# Altium PCB AMS_Slave_no_viable.PcbDoc
Units mm, origin at the board's own origin, x right, y up, seen from the top; angles counter-clockwise.
Board outline 84.45 x 58.17 mm, 2 copper layers (Top Layer, Bottom Layer); 196 components, 139 nets, 544 pads, 2 vias.
Unrouted connection lines stored in the file: 391.
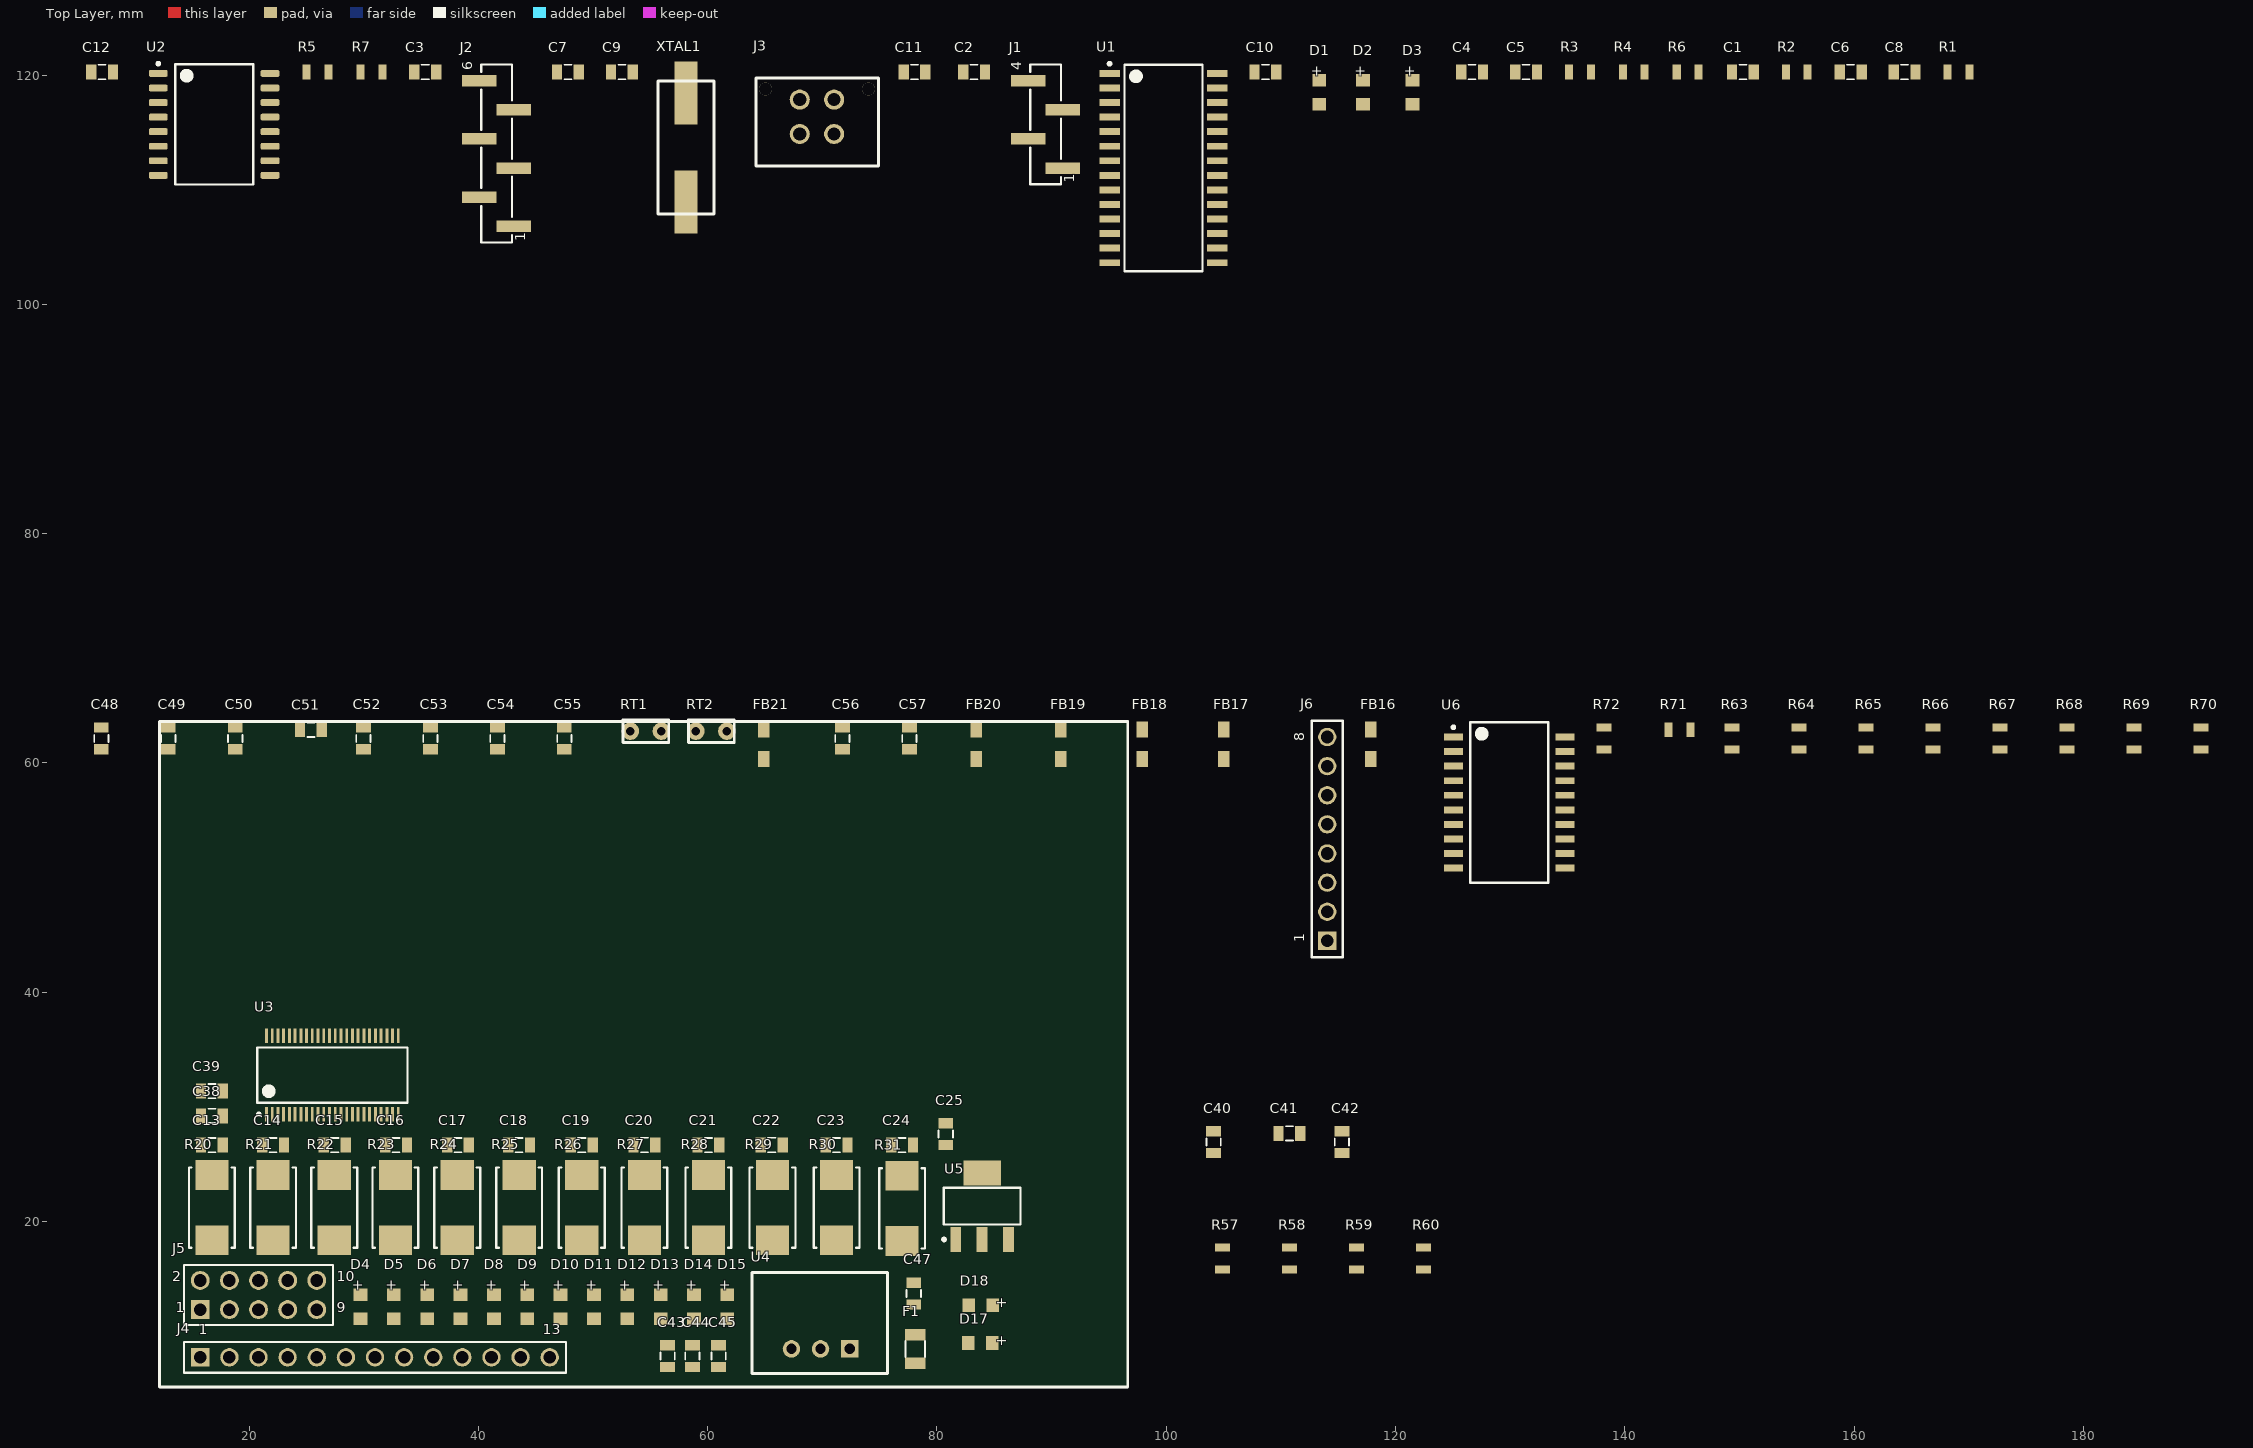
[diagram p0: Top Layer view]
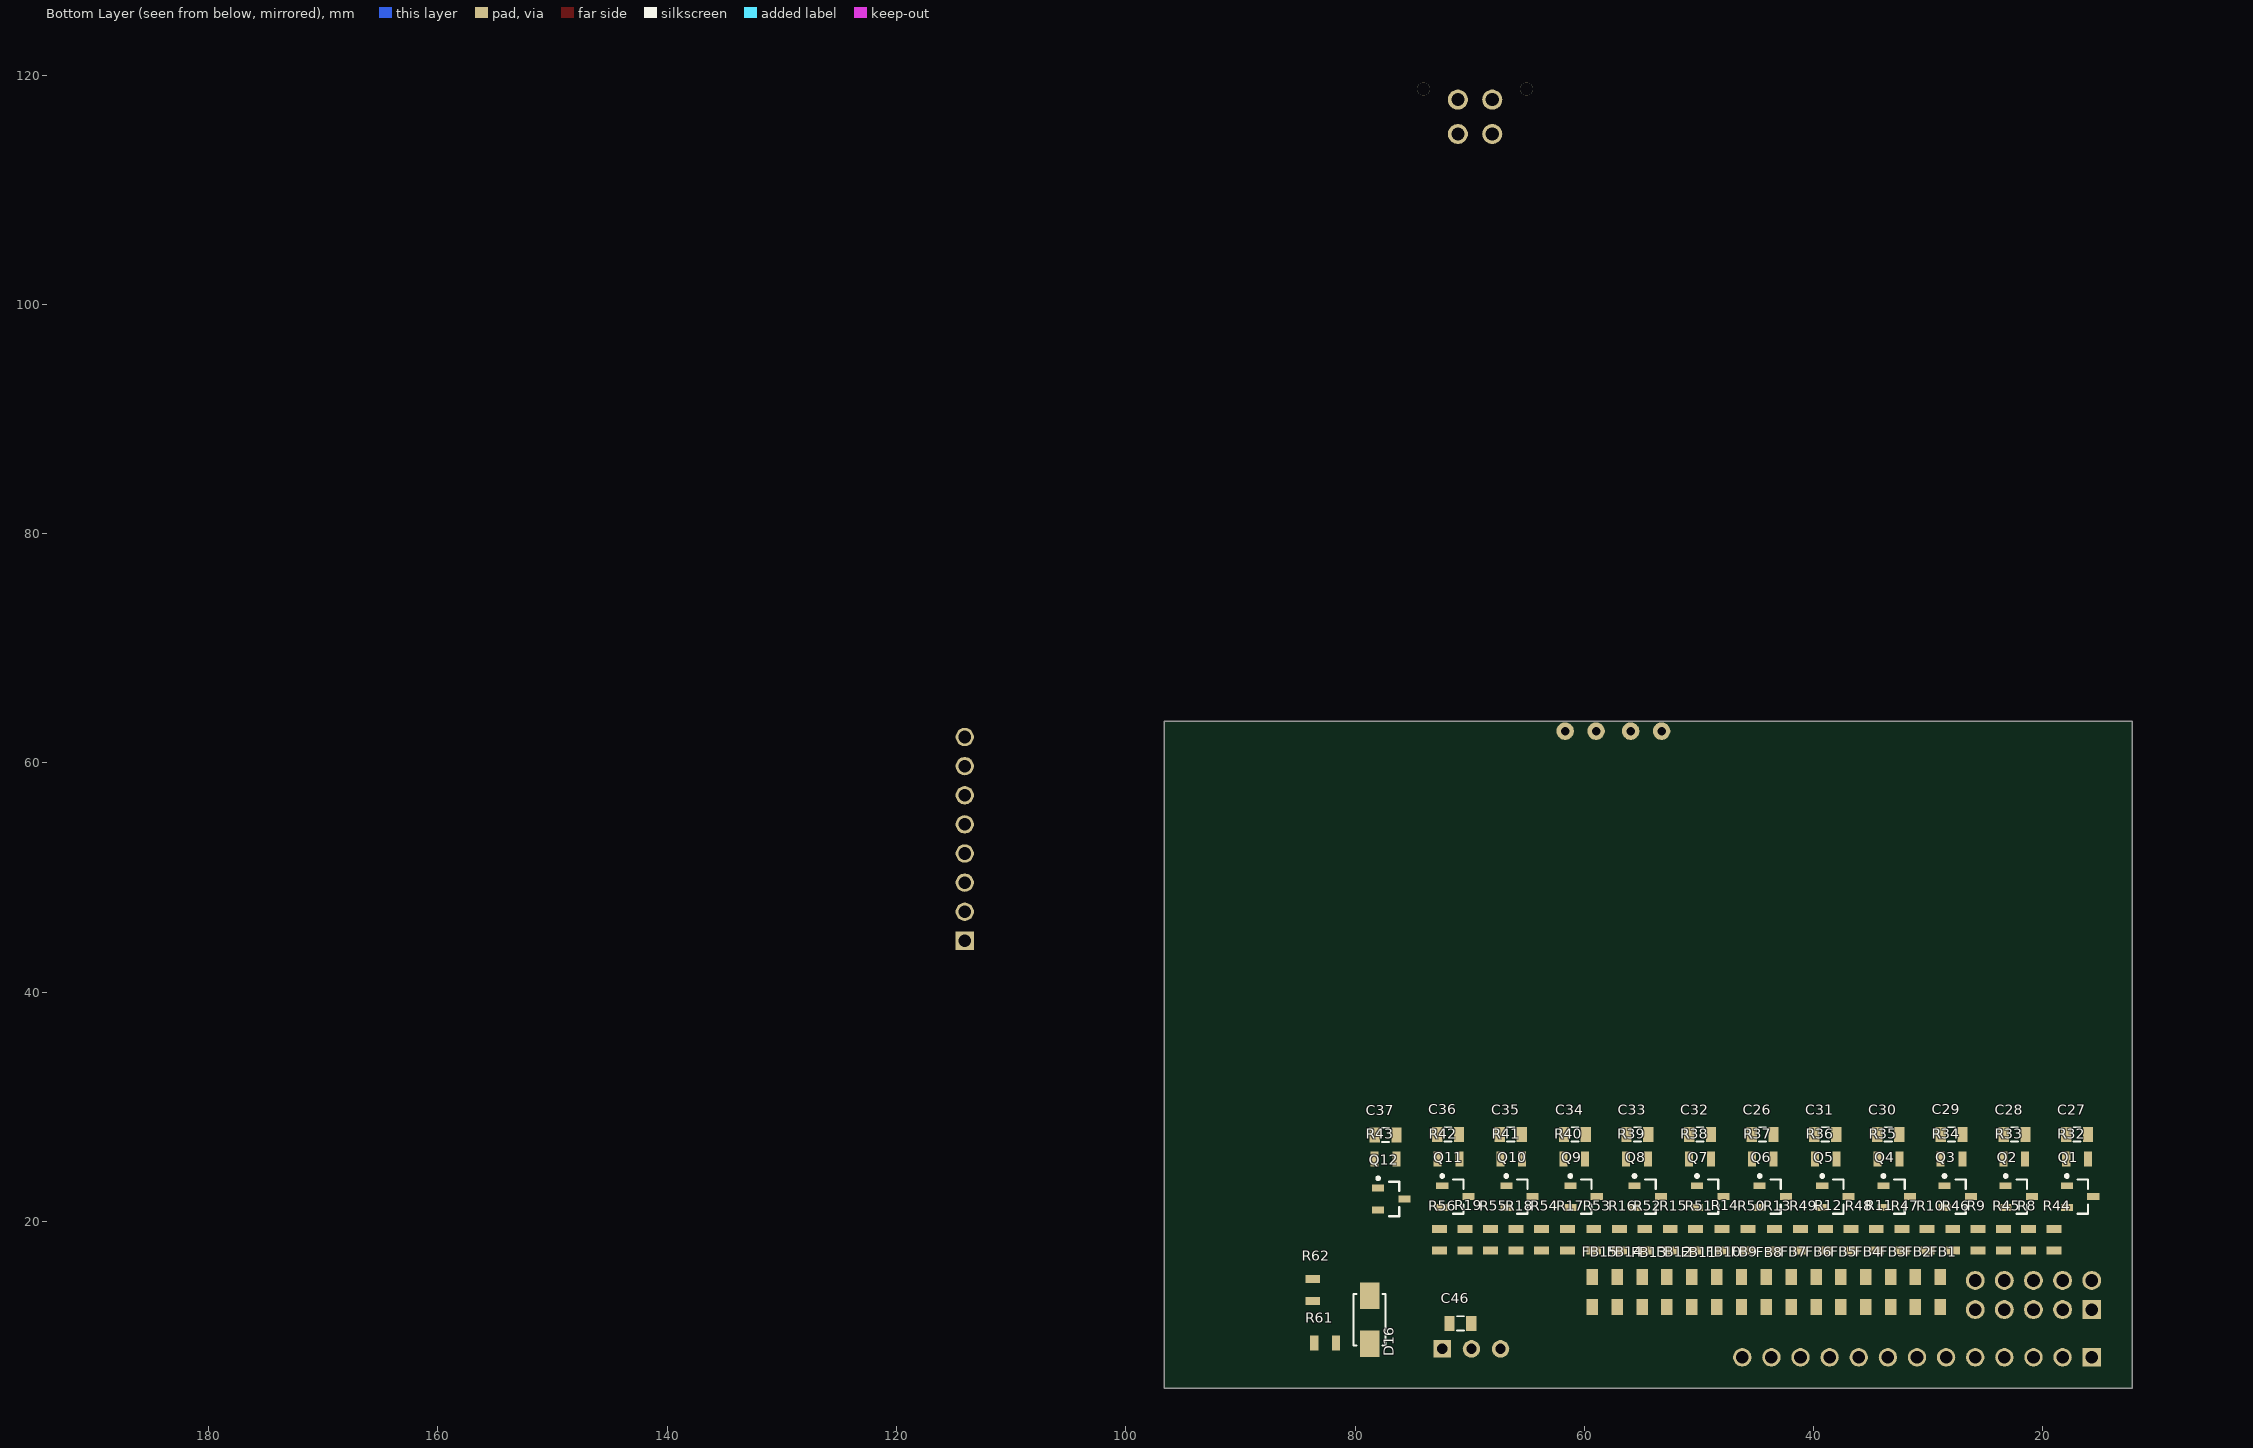
[diagram p1: Bottom Layer view, seen from below]

## Layer stack, top to bottom
Top Solder: solder mask 0.0102, Solder Resist, Dk 3.5
Top Layer: signal copper 0.0356
Dielectric 1: dielectric 0.32, FR-4, Dk 4.8
Bottom Layer: signal copper 0.0356
Bottom Solder: solder mask 0.0102, Solder Resist, Dk 3.5

## Board outline
12.192,5.461 96.647,5.461 96.647,63.627 12.192,63.627

## Design rules (kind name [scope] priority, off if disabled: settings)
Clearance [All] p1: gap=0.254 ignorepadtopadclearanceinfootprint=FALSE except(0: Arc-Hole Track-Hole SMDPad-Hole THPad-Hole Via-Hole Fill-Hole Poly-Hole Region-Hole Text-Hole)
PolygonConnect [All] p1: connectstyle=Relief reliefconductorwidth=0.254 reliefentries=4 polygonreliefangle="90 Angle" airgapwidth=0.254
RoomDefinition AMS_temperature [InComponentClass('AMS_temperature')] p1: confinementstyle=ConfineIn formatcopy=TRUE lockcomponents=FALSE outline 12.192,42.702 200.279,42.702 200.279,66.578 12.192,66.578
RoomDefinition AMS_supply [InComponentClass('AMS_supply')] p2: confinementstyle=ConfineIn formatcopy=TRUE lockcomponents=FALSE outline 53.848,5.588 91.821,5.588 91.821,25.781 53.848,25.781
RoomDefinition AMS_MCU [InComponentClass('AMS_MCU')] p3: confinementstyle=ConfineIn formatcopy=TRUE lockcomponents=FALSE outline 12.192,102.362 177.927,102.362 177.927,123.952 12.192,123.952
RoomDefinition AMS_balancing [InComponentClass('AMS_balancing')] p4: confinementstyle=ConfineIn formatcopy=TRUE lockcomponents=FALSE outline 12.192,5.461 129.159,5.461 129.159,42.037 12.192,42.037
RoutingVias [All] p1: holewidth=0.711 width=1.27 viastyle="Through Hole" minholewidth=0.711 minwidth=1.27 maxholewidth=0.711 maxwidth=1.27
SolderMaskExpansion [All] p1: expansion=0.102
Width [All] p1: maxlimit=0.254 minlimit=0.254 preferedwidth=0.254
30 further rules are at their usual default settings.

## Classes and differential pairs
component class AMS_temperature: C48 C49 C50 C51 C52 C53 C54 C55 C56 C57 FB16 FB17 FB18 FB19 FB20 FB21 J6 R63 R64 R65 R66 R67 R68 R69 R70 R71 R72 RT1 RT2 U6
component class AMS_supply: C43 C44 C45 C46 C47 D16 D17 D18 F1 R61 R62 U4 U5
component class AMS_MCU: C1 C2 C3 C4 C5 C6 C7 C8 C9 C10 C11 C12 D1 D2 D3 J1 J2 J3 R1 R2 R3 R4 R5 R6 R7 U1 U2 XTAL1
component class AMS_balancing: C13 C14 C15 C16 C17 C18 C19 C20 C21 C22 C23 C24 C25 C26 C27 C28 C29 C30 C31 C32 C33 C34 C35 C36 C37 C38 C39 C40 C41 C42 D4 D5 D6 D7 D8 D9 D10 D11 D12 D13 D14 D15 FB1 FB2 FB3 FB4 FB5 FB6 FB7 FB8 FB9 FB10 FB11 FB12 FB13 FB14 FB15 J4 J5 Q1 Q2 Q3 Q4 Q5 Q6 Q7 Q8 Q9 Q10 Q11 Q12 R8 R9 R10 R11 R12 R13 R14 R15 R16 R17 R18 R19 R20 R21 R22 R23 R24 R25 R26 R27 R28 R29 R30 R31 R32 R33 R34 R35 R36 R37 R38 R39 R40 R41 R42 R43 R44 R45 R46 R47 R48 R49 R50 R51 R52 R53 R54 R55 R56 R57 R58 R59 R60 U3

## Components (designator, comment, footprint, x,y, rotation, side; value= is the part's Value field where it differs from the comment)
C1 "10nF" "0805_2x1.25x0.8mm_Reflow Soldering" 150.307,120.269 r0 top
C2 "15pF" "0805_2x1.25x0.6mm_Reflow Soldering" 83.251,120.269 r0 top
C3 "15pF" "0805_2x1.25x0.6mm_Reflow Soldering" 35.372,120.269 r0 top
C4 "1nF" "0805_2x1.25x0.8mm_Reflow Soldering" 126.685,120.269 r0 top
C5 "100nF" "0805_2x1.25x0.8mm_Reflow Soldering" 131.384,120.269 r0 top
C6 "1nF" "0805_2x1.25x0.8mm_Reflow Soldering" 159.705,120.269 r0 top
C7 "10uF" "0805_2x1.25x1.25mm_Reflow Soldering" 47.818,120.269 r0 top
C8 "100nF" "0805_2x1.25x0.8mm_Reflow Soldering" 164.404,120.269 r0 top
C9 "100nF" "0805_2x1.25x0.8mm_Reflow Soldering" 52.517,120.269 r0 top
C10 "10uF" "0805_2x1.25x1.25mm_Reflow Soldering" 108.651,120.269 r0 top
C11 "100nF" "0805_2x1.25x0.8mm_Reflow Soldering" 78.044,120.269 r0 top
C12 "10nF" "0805_2x1.25x0.8mm_Reflow Soldering" 7.178,120.269 r0 top
C13 "50V, 10nF" "0805_2x1.25x0.8mm_Reflow Soldering" 16.764,26.663 r180 top value=10nF
C14 "50V, 10nF" "0805_2x1.25x0.8mm_Reflow Soldering" 22.098,26.663 r180 top value=10nF
C15 "50V, 10nF" "0805_2x1.25x0.8mm_Reflow Soldering" 27.475,26.663 r180 top value=10nF
C16 "50V, 10nF" "0805_2x1.25x0.8mm_Reflow Soldering" 32.827,26.663 r180 top value=10nF
C17 "50V, 10nF" "0805_2x1.25x0.8mm_Reflow Soldering" 38.227,26.663 r180 top value=10nF
C18 "50V, 10nF" "0805_2x1.25x0.8mm_Reflow Soldering" 43.561,26.663 r180 top value=10nF
C19 "50V, 10nF" "0805_2x1.25x0.8mm_Reflow Soldering" 49.022,26.663 r180 top value=10nF
C20 "50V, 10nF" "0805_2x1.25x0.8mm_Reflow Soldering" 54.483,26.67 r180 top value=10nF
C21 "50V, 10nF" "0805_2x1.25x0.8mm_Reflow Soldering" 60.071,26.663 r180 top value=10nF
C22 "50V, 10nF" "0805_2x1.25x0.8mm_Reflow Soldering" 65.593,26.67 r180 top value=10nF
C23 "50V, 10nF" "0805_2x1.25x0.8mm_Reflow Soldering" 71.247,26.663 r180 top value=10nF
C24 "50V, 10nF" "0805_2x1.25x0.8mm_Reflow Soldering" 76.962,26.663 r180 top value=10nF
C25 "50V, 10nF" "0805_2x1.25x0.8mm_Reflow Soldering" 80.772,27.62 r90 top value=10nF
C26 "50V, 10nF" "0805_2x1.25x0.8mm_Reflow Soldering" 44.45,27.603 r180 bottom value=10nF
C27 "50V, 10nF" "0805_2x1.25x0.8mm_Reflow Soldering" 17.018,27.603 r180 bottom value=10nF
C28 "50V, 10nF" "0805_2x1.25x0.8mm_Reflow Soldering" 22.479,27.603 r180 bottom value=10nF
C29 "50V, 10nF" "0805_2x1.25x0.8mm_Reflow Soldering" 27.975,27.603 r180 bottom value=10nF
C30 "50V, 10nF" "0805_2x1.25x0.8mm_Reflow Soldering" 33.497,27.603 r180 bottom value=10nF
C31 "50V, 10nF" "0805_2x1.25x0.8mm_Reflow Soldering" 38.989,27.603 r180 bottom value=10nF
C32 "50V, 10nF" "0805_2x1.25x0.8mm_Reflow Soldering" 49.911,27.603 r180 bottom value=10nF
C33 "50V, 10nF" "0805_2x1.25x0.8mm_Reflow Soldering" 55.372,27.603 r180 bottom value=10nF
C34 "50V, 10nF" "0805_2x1.25x0.8mm_Reflow Soldering" 60.833,27.603 r180 bottom value=10nF
C35 "50V, 10nF" "0805_2x1.25x0.8mm_Reflow Soldering" 66.421,27.603 r180 bottom value=10nF
C36 "50V, 10nF" "0805_2x1.25x0.8mm_Reflow Soldering" 71.882,27.603 r180 bottom value=10nF
C37 "50V, 10nF" "0805_2x1.25x0.8mm_Reflow Soldering" 77.343,27.559 r180 bottom value=10nF
C38 "50V, 10nF" "0805_2x1.25x0.8mm_Reflow Soldering" 16.764,29.21 r180 top value=10nF
C39 "50V, 100nF" "0805_2x1.25x0.8mm_Reflow Soldering" 16.764,31.369 r180 top value=100nF
C40 "50V, 1uF" "0805_2x1.25x1.25mm_Reflow Soldering" 104.14,26.924 r90 top value=1uF
C41 "50V, 1uF" "0805_2x1.25x1.25mm_Reflow Soldering" 110.744,27.686 r0 top value=1uF
C42 "50V, 1uF" "0805_2x1.25x1.25mm_Reflow Soldering" 115.316,26.924 r90 top value=1uF
C43 "1uF" "0805_2x1.25x1.25mm_Reflow Soldering" 56.515,8.255 r270 top
C44 "1uF" "0805_2x1.25x1.25mm_Reflow Soldering" 58.674,8.255 r270 top
C45 "1uF" "0805_2x1.25x1.25mm_Reflow Soldering" 60.96,8.255 r270 top
C46 "100nF" "0805_2x1.25x0.8mm_Reflow Soldering" 70.809,11.117 r0 bottom
C47 "10nF" "0805_2x1.25x0.8mm_Reflow Soldering" 77.978,13.716 r90 top
C48 "10nF" "0805_2x1.25x0.8mm_Reflow Soldering" 7.112,62.133 r90 top
C49 "10nF" "0805_2x1.25x0.8mm_Reflow Soldering" 12.954,62.133 r90 top
C50 "10nF" "0805_2x1.25x0.8mm_Reflow Soldering" 18.796,62.133 r90 top
C51 "10nF" "0805_2x1.25x0.8mm_Reflow Soldering" 25.4,62.895 r0 top
C52 "10nF" "0805_2x1.25x0.8mm_Reflow Soldering" 29.972,62.133 r90 top
C53 "10nF" "0805_2x1.25x0.8mm_Reflow Soldering" 35.814,62.133 r90 top
C54 "10nF" "0805_2x1.25x0.8mm_Reflow Soldering" 41.656,62.133 r90 top
C55 "10nF" "0805_2x1.25x0.8mm_Reflow Soldering" 47.498,62.133 r90 top
C56 "10nF" "0805_2x1.25x0.8mm_Reflow Soldering" 71.755,62.133 r90 top
C57 "100nF" "0805_2x1.25x0.8mm_Reflow Soldering" 77.597,62.133 r90 top
D1 "Blue" WL-SMCW_0805 113.35,118.491 r90 top
D2 "Blue" WL-SMCW_0805 117.16,118.491 r90 top
D3 "Red" WL-SMCW_0805 121.478,118.491 r90 top
D4 "Yellow" WL-SMCW_0805 29.718,12.574 r90 top
D5 "Yellow" WL-SMCW_0805 32.627,12.574 r90 top
D6 "Yellow" WL-SMCW_0805 35.537,12.574 r90 top
D7 "Yellow" WL-SMCW_0805 38.446,12.574 r90 top
D8 "Yellow" WL-SMCW_0805 41.356,12.574 r90 top
D9 "Yellow" WL-SMCW_0805 44.265,12.574 r90 top
D10 "Yellow" WL-SMCW_0805 47.175,12.574 r90 top
D11 "Yellow" WL-SMCW_0805 50.084,12.574 r90 top
D12 "Yellow" WL-SMCW_0805 52.994,12.574 r90 top
D13 "Yellow" WL-SMCW_0805 55.903,12.574 r90 top
D14 "Yellow" WL-SMCW_0805 58.813,12.574 r90 top
D15 "Yellow" WL-SMCW_0805 61.722,12.574 r90 top
D16 "400W, 5V" WE-TVSP_DO-214AC_Bidirectional 78.74,11.43 r270 bottom
D17 "Green" WL-SMCW_0805 83.786,9.398 r0 top
D18 "Bright Green" WL-SMCW_0805 83.82,12.7 r0 top
F1 "63 V, 0.5A" "437 Series" 78.105,8.89 r90 top
FB1 "560 Ohm" "0805_High Current" 28.956,13.843 r90 bottom
FB2 "560 Ohm" "0805_High Current" 31.123,13.843 r90 bottom
FB3 "560 Ohm" "0805_High Current" 33.291,13.843 r90 bottom
FB4 "560 Ohm" "0805_High Current" 35.458,13.843 r90 bottom
FB5 "560 Ohm" "0805_High Current" 37.626,13.843 r90 bottom
FB6 "560 Ohm" "0805_High Current" 39.793,13.843 r90 bottom
FB7 "560 Ohm" "0805_High Current" 41.96,13.843 r90 bottom
FB8 "560 Ohm" "0805_High Current" 44.128,13.843 r90 bottom
FB9 "560 Ohm" "0805_High Current" 46.295,13.843 r90 bottom
FB10 "560 Ohm" "0805_High Current" 48.463,13.843 r90 bottom
FB11 "560 Ohm" "0805_High Current" 50.63,13.843 r90 bottom
FB12 "560 Ohm" "0805_High Current" 52.797,13.843 r90 bottom
FB13 "560 Ohm" "0805_High Current" 54.965,13.843 r90 bottom
FB14 "560 Ohm" "0805_High Current" 57.132,13.843 r90 bottom
FB15 "560 Ohm" "0805_High Current" 59.299,13.843 r90 bottom
FB16 "560 Ohm" "0805_High Current" 117.856,61.625 r90 top
FB17 "560 Ohm" "0805_High Current" 105.029,61.625 r90 top
FB18 "560 Ohm" "0805_High Current" 97.917,61.625 r90 top
FB19 "560 Ohm" "0805_High Current" 90.805,61.625 r90 top
FB20 "560 Ohm" "0805_High Current" 83.439,61.625 r90 top
FB21 "560 Ohm" "0805_High Current" 64.897,61.625 r90 top
J1 "61000418221" 61000418221 89.474,115.697 r90 top
J2 "61000618221" 61000618221 41.595,113.157 r90 top
J3 "43045-0427" 43045-0427 69.535,117.856 r0 top
J4 "61301311121" 61301311121-bottom 30.988,8.154 r0 top
J5 "61301021121" 61301021121 20.828,13.589 r0 top
J6 "61300811121" 61300811121-top 114.046,53.37 r90 top
Q1 "BSS308PE" INF-PG-SOT23_N 16.764,22.169 r180 bottom
Q2 "BSS308PE" INF-PG-SOT23_N 22.098,22.169 r180 bottom
Q3 "BSS308PE" INF-PG-SOT23_N 27.432,22.169 r180 bottom
Q4 "BSS308PE" INF-PG-SOT23_N 32.766,22.169 r180 bottom
Q5 "BSS308PE" INF-PG-SOT23_N 38.1,22.169 r180 bottom
Q6 "BSS308PE" INF-PG-SOT23_N 43.561,22.169 r180 bottom
Q7 "BSS308PE" INF-PG-SOT23_N 49.022,22.169 r180 bottom
Q8 "BSS308PE" INF-PG-SOT23_N 54.483,22.169 r180 bottom
Q9 "BSS308PE" INF-PG-SOT23_N 60.071,22.169 r180 bottom
Q10 "BSS308PE" INF-PG-SOT23_N 65.659,22.169 r180 bottom
Q11 "BSS308PE" INF-PG-SOT23_N 71.247,22.169 r180 bottom
Q12 "BSS308PE" INF-PG-SOT23_N 76.835,21.971 r180 bottom
R1 "10kΩ" CR0805 169.103,120.269 r0 top
R2 "100Ω" CR0805 155.006,120.269 r0 top
R3 "470Ω" CR0805 136.083,120.269 r0 top
R4 "470Ω" CR0805 140.782,120.269 r0 top
R5 "60.4Ω" CR0805 25.974,120.269 r0 top
R6 "470Ω" CR0805 145.481,120.269 r0 top
R7 "60.4Ω" CR0805 30.673,120.269 r0 top
R8 "470Ω" CR0805 21.254,18.415 r90 bottom
R9 "470Ω" CR0805 25.663,18.415 r90 bottom
R10 "470Ω" CR0805 30.099,18.415 r90 bottom
R11 "470Ω" CR0805 34.544,18.415 r90 bottom
R12 "470Ω" CR0805 38.953,18.415 r90 bottom
R13 "470Ω" CR0805 43.434,18.415 r90 bottom
R14 "470Ω" CR0805 48.006,18.415 r90 bottom
R15 "470Ω" CR0805 52.512,18.415 r90 bottom
R16 "470Ω" CR0805 56.941,18.415 r90 bottom
R17 "470Ω" CR0805 61.468,18.415 r90 bottom
R18 "470Ω" CR0805 65.958,18.415 r90 bottom
R19 "470Ω" CR0805 70.403,18.415 r90 bottom
R20 "2W, 15Ω" SMW215RJT 16.764,21.209 r90 top value=15O
R21 "2W, 15Ω" SMW215RJT 22.098,21.209 r90 top value=15O
R22 "2W, 15Ω" SMW215RJT 27.432,21.209 r90 top value=15O
R23 "2W, 15Ω" SMW215RJT 32.766,21.209 r90 top value=15O
R24 "2W, 15Ω" SMW215RJT 38.166,21.209 r90 top value=15O
R25 "2W, 15Ω" SMW215RJT 43.561,21.209 r90 top value=15O
R26 "2W, 15Ω" SMW215RJT 49.022,21.209 r90 top value=15O
R27 "2W, 15Ω" SMW215RJT 54.483,21.209 r90 top value=15O
R28 "2W, 15Ω" SMW215RJT 60.071,21.209 r90 top value=15O
R29 "2W, 15Ω" SMW215RJT 65.659,21.209 r90 top value=15O
R30 "2W, 15Ω" SMW215RJT 71.247,21.209 r90 top value=15O
R31 "2W, 15Ω" SMW215RJT 76.962,21.138 r90 top value=15O
R32 "1kΩ" CR0805 17.018,25.449 r180 bottom
R33 "1kΩ" CR0805 22.502,25.449 r180 bottom
R34 "1kΩ" CR0805 27.986,25.449 r180 bottom
R35 "1kΩ" CR0805 33.47,25.449 r180 bottom
R36 "1kΩ" CR0805 38.954,25.449 r180 bottom
R37 "1kΩ" CR0805 44.438,25.449 r180 bottom
R38 "1kΩ" CR0805 49.923,25.449 r180 bottom
R39 "1kΩ" CR0805 55.407,25.449 r180 bottom
R40 "1kΩ" CR0805 60.891,25.449 r180 bottom
R41 "1kΩ" CR0805 66.375,25.449 r180 bottom
R42 "1kΩ" CR0805 71.859,25.449 r180 bottom
R43 "1kΩ" CR0805 77.343,25.449 r180 bottom
R44 "100Ω" CR0805 19.05,18.415 r90 bottom
R45 "100Ω" CR0805 23.459,18.415 r90 bottom
R46 "100Ω" CR0805 27.867,18.415 r90 bottom
R47 "100Ω" CR0805 32.303,18.415 r90 bottom
R48 "100Ω" CR0805 36.748,18.415 r90 bottom
R49 "100Ω" CR0805 41.157,18.415 r90 bottom
R50 "100Ω" CR0805 45.72,18.415 r90 bottom
R51 "100Ω" CR0805 50.292,18.415 r90 bottom
R52 "100Ω" CR0805 54.737,18.415 r90 bottom
R53 "100Ω" CR0805 59.182,18.415 r90 bottom
R54 "100Ω" CR0805 63.754,18.415 r90 bottom
R55 "100Ω" CR0805 68.199,18.415 r90 bottom
R56 "100Ω" CR0805 72.644,18.415 r90 bottom
R57 "4.7kΩ" CR0805 104.902,16.764 r90 top
R58 "4.7kΩ" CR0805 110.744,16.764 r90 top
R59 "4.7kΩ" CR0805 116.586,16.764 r90 top
R60 "4.7kΩ" CR0805 122.428,16.764 r90 top
R61 "470Ω" CR0805 82.611,9.398 r180 bottom
R62 "470Ω" CR0805 83.693,14.036 r90 bottom
R63 "10kΩ" CR0805 149.352,62.133 r90 top
R64 "10kΩ" CR0805 155.194,62.133 r90 top
R65 "10kΩ" CR0805 161.036,62.133 r90 top
R66 "10kΩ" CR0805 166.878,62.133 r90 top
R67 "10kΩ" CR0805 172.72,62.133 r90 top
R68 "10kΩ" CR0805 178.562,62.133 r90 top
R69 "10kΩ" CR0805 184.404,62.133 r90 top
R70 "10kΩ" CR0805 190.246,62.133 r90 top
R71 "4.7kΩ" CR0805 144.78,62.895 r0 top
R72 "4.7kΩ" CR0805 138.176,62.133 r90 top
RT1 "10kΩ" NXRT15XV103FA1B040 54.61,62.768 r0 top
RT2 "10kΩ" NXRT15XV103FA1B040 60.325,62.768 r0 top
U1 "PIC24HJ128GP502" PIC24HJ128GP502 99.761,111.887 r0 top
U2 "ISO1050DW" ISO1050DW 16.957,115.697 r0 top
U3 "LTC6811-2" LTC6811-2 27.269,32.77 r90 top
U4 "R-78HB5.0-0.5 / 173010542" R-78HB5.0-0.5 69.85,8.89 r180 top
U5 "1.5 - 13.8 Vin, 3.3 Vout" LM1117IMP3.3 83.947,21.336 r90 top
U6 "LTC1296" LTC1296 129.921,56.545 r0 top
XTAL1 "20MHz" 830028710 58.105,113.665 r90 top

## Footprints (in the part's own frame and the unit in brackets; to place one, negate y for a bottom-side part, rotate by r counter-clockwise, add the part's x,y. Pads: shape width x height; smd on the part's side, far side on the other; paste and mask are expansions set on the pad)
"437 Series" [mm] "Littlefuse, 437A Series"
  rect 1x1.8 smd: 1(-1.25,0) 2(1.25,0)
  silkscreen extent -0.7,-0.85 0.7,0.85, body extent -1.6,-0.71 1.6,0.71, height 1
"0805_2x1.25x0.6mm_Reflow Soldering" [mm] "Ceramic Capacitors, 0805, body 2x1.25mm"
  rect 0.9x1.3 smd: 1(-0.95,0) 2(0.95,0)
  silkscreen extent -0.32,-0.62 0.32,0.63, body extent -1,-0.62 1,0.63, height 0.63
"0805_2x1.25x0.8mm_Reflow Soldering" [mm] "Ceramic Capacitors, 0805, body 2x1.25mm"
  rect 0.9x1.3 smd: 1(-0.95,0) 2(0.95,0)
  silkscreen extent -0.32,-0.62 0.32,0.63, body extent -1,-0.62 1,0.63, height 0.83
"0805_2x1.25x1.25mm_Reflow Soldering" [mm] "Ceramic Capacitors, 0805, body 2x1.25mm"
  rect 0.9x1.3 smd: 1(-0.95,0) 2(0.95,0)
  silkscreen extent -0.32,-0.62 0.32,0.63, body extent -1,-0.62 1,0.63, height 1.28
"0805_High Current" [mm] "SMD EMI Suppression Ferrite Bead, 2-Leads, Body 2.00x1.20mm, IPC Medium Density"
  rect 1.4x1 smd: 1(-1.3,0) 2(1.3,0)
  body extent -1,-0.6 1,0.6, height 0.93
43045-0427 [mm] "Micro-Fit 3.0 Vertical Header, 3.00mm Pitch, Dual Row, 4 Circuits, Black"
  round 1.75 hole 1.15: 1(1.5,0) 2(-1.5,0) 3(1.5,-3) 4(-1.5,-3)
  silkscreen extent -5.33,-5.8 5.38,1.9, body extent -5.07,-5.52 5.08,3.25, height 9.95
830028710 [mm]
  rect 5.5x2 smd: 1(-4.75,0) 2(4.75,0)
  silkscreen extent -5.8,-2.45 5.8,2.45, body extent -5.8,-2.45 5.8,2.45, height 4.3
61000418221 [mm] "Pin Header, pitch 2.54 mm, SMD, Vertical, single row, 4p"
  rect 1x3 smd: 1(-3.81,-1.5) 2(-1.27,1.5) 3(1.27,-1.5) 4(3.81,1.5)
  silkscreen extent -5.23,-1.35 5.23,1.34, body extent -5.08,-2.5 5.08,2.5, height 9.33
61000618221 [mm] "Pin Header, pitch 2.54 mm, SMD, Vertical, single row, 6p"
  rect 1x3 smd: 1(-6.35,-1.5) 2(-3.81,1.5) 3(-1.27,-1.5) 4(1.27,1.5) 5(3.81,-1.5) 6(6.35,1.5)
  silkscreen extent -7.77,-1.35 7.77,1.34, body extent -7.62,-2.5 7.62,2.5, height 9.33
61300811121-top [mm] "Pin Header, pitch 2.54 mm, THT, Vertical, single row, 8p"
  rect 1.6x1.6 hole 1.1: 1(-8.89,0)
  round 1.6 hole 1.1: 2(-6.35,0) 3(-3.81,0) 4(-1.27,0) 5(1.27,0) 6(3.81,0) 7(6.35,0) 8(8.89,0)
  silkscreen extent -10.31,-1.35 10.31,1.35, body extent -10.16,-1.27 10.16,1.27, height 8.57
61301021121 [mm] "Pin Header, pitch 2.54 mm, THT, Vertical, dual row, 10p"
  rect 1.65x1.65 hole 1.1: 1(-5.08,-1.27)
  round 1.65 hole 1.1: 2(-5.08,1.27) 3(-2.54,-1.27) 4(-2.54,1.27) 5(0,-1.27) 6(0,1.27) 7(2.54,-1.27) 8(2.54,1.27) 9(5.08,-1.27) 10(5.08,1.27)
  silkscreen extent -6.5,-2.62 6.5,2.62, body extent -6.35,-2.54 6.35,2.54, height 8.59
61301311121-bottom [mm] "Pin Header, pitch 2.54 mm, THT, Vertical, single row, 13p"
  rect 1.6x1.6 hole 1.1: 1(-15.24,0)
  round 1.6 hole 1.1: 2(-12.7,0) 3(-10.16,0) 4(-7.62,0) 5(-5.08,0) 6(-2.54,0) 7(0,0) 8(2.54,0) 9(5.08,0) 10(7.62,0) 11(10.16,0) 12(12.7,0) 13(15.24,0)
  silkscreen extent -16.66,-1.35 16.66,1.35, body extent -16.51,-1.27 16.51,1.27, height 8.57
CR0805 [mm] "Chip Resistor, 2-Leads, Body 2,00x1,25mm, IPC Medium Density"
  rect 0.7x1.3 smd: 1(-0.95,0) 2(0.95,0)
  body extent -1.08,-0.7 1.07,0.7, height 0.6
INF-PG-SOT23_N [mm] "SOT23, 3-Leads, Body 2.9x1.3mm, Pitch 0.95mm, IPC Medium Density"
  rect 1.05x0.6 smd: 1(-1.15,0.95) 2(-1.15,-0.95) 3(1.15,0)
  silkscreen extent -1.28,-1.5 0.7,1.92, body extent -0.7,-1.5 0.7,1.5, height 1.1
ISO1050DW [mm] "SOIC, 16-Leads, Body 10,30x7,50mm, Pitch 1,27mm, IPC Medium Density"
  rrect50% 1.65x0.6 smd: 1(-4.875,4.445) 2(-4.875,3.175) 3(-4.875,1.905) 4(-4.875,0.635) 5(-4.875,-0.635) 6(-4.875,-1.905) 7(-4.875,-3.175) 8(-4.875,-4.445) 9(4.875,-4.445) 10(4.875,-3.175) 11(4.875,-1.905) 12(4.875,-0.635) 13(4.875,0.635) 14(4.875,1.905) 15(4.875,3.175) 16(4.875,4.445)
  silkscreen extent -5,-5.25 3.4,5.42, body extent -5.17,-5.15 5.17,5.15, height 2.59
LM1117IMP3.3 [mm] "SOT223, 4-Leads, Body 6,50x7,00mm (avg), Pitch 2,30mm, IPC Medium Density"
  rect 2.15x0.95 smd: 1(-2.9,2.3) 2(-2.9,0) 3(-2.9,-2.3)
  rect 2.15x3.25 smd: 4(2.9,0)
  silkscreen extent -3.02,-3.35 1.6,3.45, body extent -3.5,-3.25 3.5,3.25, height 1.68
LTC1296 [mm] "SOL, 20-Leads, Body 13,30x7,49mm, Pitch 1,27mm, IPC Medium Density"
  rect 1.65x0.6 smd: 1(-4.875,5.715) 2(-4.875,4.445) 3(-4.875,3.175) 4(-4.875,1.905) 5(-4.875,0.635) 6(-4.875,-0.635) 7(-4.875,-1.905) 8(-4.875,-3.175) 9(-4.875,-4.445) 10(-4.875,-5.715) 11(4.875,-5.715) 12(4.875,-4.445) 13(4.875,-3.175) 14(4.875,-1.905) 15(4.875,-0.635) 16(4.875,0.635) 17(4.875,1.905) 18(4.875,3.175) 19(4.875,4.445) 20(4.875,5.715)
  silkscreen extent -5,-7 3.4,7, body extent -3.8,-7 3.8,7, height 2.95
LTC6811-2 [mm] "SSOP, 48-Leads, Body 12,80x5,30mm, Pitch 0,50mm, IPC Medium Density"
  rect 1.25x0.25 smd: 1(-3.425,5.75) 2(-3.425,5.25) 3(-3.425,4.75) 4(-3.425,4.25) 5(-3.425,3.75) 6(-3.425,3.25) 7(-3.425,2.75) 8(-3.425,2.25) 9(-3.425,1.75) 10(-3.425,1.25) 11(-3.425,0.75) 12(-3.425,0.25) 13(-3.425,-0.25) 14(-3.425,-0.75) 15(-3.425,-1.25) 16(-3.425,-1.75) 17(-3.425,-2.25) 18(-3.425,-2.75) 19(-3.425,-3.25) 20(-3.425,-3.75) 21(-3.425,-4.25) 22(-3.425,-4.75) 23(-3.425,-5.25) 24(-3.425,-5.75) 25(3.425,-5.75) 26(3.425,-5.25) 27(3.425,-4.75) 28(3.425,-4.25) 29(3.425,-3.75) 30(3.425,-3.25) 31(3.425,-2.75) 32(3.425,-2.25) 33(3.425,-1.75) 34(3.425,-1.25) 35(3.425,-0.75) 36(3.425,-0.25) 37(3.425,0.25) 38(3.425,0.75) 39(3.425,1.25) 40(3.425,1.75) 41(3.425,2.25) 42(3.425,2.75) 43(3.425,3.25) 44(3.425,3.75) 45(3.425,4.25) 46(3.425,4.75) 47(3.425,5.25) 48(3.425,5.75)
  silkscreen extent -3.55,-6.55 2.4,6.55, body extent -2.8,-6.55 2.8,6.55, height 2
NXRT15XV103FA1B040 [mil]
  round 60 hole 30: 1(-53.15,0) 2(53.15,0)
  silkscreen extent -79,-39 79,39, body extent -79,-39 79,39, height 295
PIC24HJ128GP502 [mm] "SOP, 28-Leads, Body 17,90x7,50mm, Pitch 1,27mm, IPC Medium Density"
  rect 1.8x0.6 smd: 1(-4.7,8.255) 2(-4.7,6.985) 3(-4.7,5.715) 4(-4.7,4.445) 5(-4.7,3.175) 6(-4.7,1.905) 7(-4.7,0.635) 8(-4.7,-0.635) 9(-4.7,-1.905) 10(-4.7,-3.175) 11(-4.7,-4.445) 12(-4.7,-5.715) 13(-4.7,-6.985) 14(-4.7,-8.255) 15(4.7,-8.255) 16(4.7,-6.985) 17(4.7,-5.715) 18(4.7,-4.445) 19(4.7,-3.175) 20(4.7,-1.905) 21(4.7,-0.635) 22(4.7,0.635) 23(4.7,1.905) 24(4.7,3.175) 25(4.7,4.445) 26(4.7,5.715) 27(4.7,6.985) 28(4.7,8.255)
  silkscreen extent -4.82,-9 3.4,9.23, body extent -3.8,-9 3.8,9, height 2.65
R-78HB5.0-0.5 [mil] "3 leads"
  rect 60x60 hole 35.43: 1(-100,0)
  round 60 hole 35.43: 2(0,0) 3(100,0)
  silkscreen extent -229,-262 235,85, body extent -223,-256 229,79, height 689
SMW215RJT [mm] "SM_2 package, 2-Leads, Body 6,70x4,00mm, IPC Medium Density"
  rect 2.6x2.9 smd: 1(-2.85,0) 2(2.85,0)
  silkscreen extent -3.5,-2 3.5,2, body extent -3.49,-2 3.33,2, height 3.52
WE-TVSP_DO-214AC_Bidirectional [mm] "Power TVS Diode, 2-Leads. body 4.5x2.8mm"
  rect 2.3x1.7 smd: 1(-2.1,0) 2(2.1,0)
  silkscreen extent -2.25,-1.4 2.25,1.4, body extent -2.56,-1.33 2.56,1.34, height 2.24
WL-SMCW_0805 [mm] "SMD Mono-color Chip LED, body 2.0x1.25mm"
  rect 1.1x1.2 smd: 1(-1.05,0) 2(1.05,0)
  body extent -1,-0.63 1,0.62, height 0.7

## Part data
C1 C12 C13 C14 C15 C16 C17 C18 C19 C20 C21 C22 C23 C24 C25 C26 C27 C28 C29 C30 C31 C32 C33 C34 C35 C36 C37 C38 C47 C48 C49 C50 C51 C52 C53 C54 C55 C56: library part 885012207092, "WCAP-CSGP Ceramic Capacitors, 0805, X7R, 50V, 10nF", Operating Temperature="-55 °C to +125 °C", Rated Voltage="50V DC", Ceramic Type=X7R, ComponentLink1Description=Manufacturer, ComponentLink1URL=http://www.we-online.de, ComponentLink2Description=Datasheet, ComponentLink2URL=http://katalog.we-online.de/pbs/datasheet/885012207092.pdf, Part Number=885012207092, Publisher="Wurth Elektronik", Size=0805
C2 C3: library part 885012007052, "WCAP-CSGP Ceramic Capacitors, 0805, NP0, 50V, 15pF", Operating Temperature="-55 °C to +125 °C", Rated Voltage="50V DC", Ceramic Type=NP0, ComponentLink1Description=Manufacturer, ComponentLink1URL=http://www.we-online.de, ComponentLink2Description=Datasheet, ComponentLink2URL=http://katalog.we-online.de/pbs/datasheet/885012007052.pdf, Part Number=885012007052, Published Date="Oct. 2017", Publisher="Wurth Elektronik", Size=0805
C4 C6: library part 885012007063, "WCAP-CSGP Ceramic Capacitors, 0805, NP0, 50V, 1nF", Operating Temperature="-55 °C to +125 °C", Rated Voltage="50V DC", Ceramic Type=NP0, ComponentLink1Description=Manufacturer, ComponentLink1URL=http://www.we-online.de, ComponentLink2Description=Datasheet, ComponentLink2URL=http://katalog.we-online.de/pbs/datasheet/885012007063.pdf, Part Number=885012007063, Published Date="Oct. 2017", Publisher="Wurth Elektronik", Size=0805
C5 C8 C9 C11 C39 C46 C57: library part 885012207098, "WCAP-CSGP Ceramic Capacitors, 0805, X7R, 50V, 100nF", Operating Temperature="-55 °C to +125 °C", Rated Voltage="50V DC", Ceramic Type=X7R, ComponentLink1Description=Manufacturer, ComponentLink1URL=http://www.we-online.de, ComponentLink2Description=Datasheet, ComponentLink2URL=http://katalog.we-online.de/pbs/datasheet/885012207098.pdf, Part Number=885012207098, Publisher="Wurth Elektronik", Size=0805
C7 C10: library part 885012107014, "WCAP-CSGP Ceramic Capacitors, 0805, X5R, 16V, 10uF", Operating Temperature="-55 °C to +125 °C", Rated Voltage="16V DC", Ceramic Type=X5R, ComponentLink1Description=Manufacturer, ComponentLink1URL=http://www.we-online.de, ComponentLink2Description=Datasheet, ComponentLink2URL=http://katalog.we-online.de/pbs/datasheet/885012107014.pdf, Part Number=885012107014, Published Date="Oct. 2017", Publisher="Wurth Elektronik", Size=0805
C40 C41 C42 C43 C44 C45: library part 885012207103, "WCAP-CSGP Ceramic Capacitors, 0805, X7R, 50V, 1uF", Operating Temperature="-55 °C to +125 °C", Rated Voltage="50V DC", Ceramic Type=X7R, ComponentLink1Description=Manufacturer, ComponentLink1URL=http://www.we-online.de, ComponentLink2Description=Datasheet, ComponentLink2URL=http://katalog.we-online.de/pbs/datasheet/885012207103.pdf, Part Number=885012207103, Publisher="Wurth Elektronik", Size=0805
D1 D2: library part 150080BS75000, "SMT Mono-color Chip LED Waterclear WL-SMCW, size 0805, Blue, 3.2 V, 140 deg, 145 mcd", Forward Voltage="3.2 V", Operating Temperature="-40 to 85 degC", Chip Technology=InGaN, ComponentLink1Description=Manufacturer, ComponentLink1URL=http://www.we-online.de, ComponentLink2Description=Datasheet, ComponentLink2URL=https://katalog.we-online.de/led/datasheet/150080BS75000.pdf, Dominant Wavelength="470 nm", Emitting Color=Blue, Luminous Intensity="145 mcd", Mounting Technology=SMT, Packaging="Tape and Reel", Part Number=150080BS75000, Peak Wavelength="465 nm", Published Date="November 2018", Publisher="Wurth Elektronik", Size=0805, Viewing Angle="140 deg"
D3: library part 150080RS75000, "SMT Mono-color Chip LED Waterclear WL-SMCW, size 0805, Red, 2 V, 140 deg, 150 mcd", Forward Voltage="2 V", Operating Temperature="-40 to 85 degC", Chip Technology=AlInGaP, ComponentLink1Description=Manufacturer, ComponentLink1URL=http://www.we-online.de, ComponentLink2Description=Datasheet, ComponentLink2URL=https://katalog.we-online.de/led/datasheet/150080RS75000.pdf, Dominant Wavelength="625 nm", Emitting Color=Red, Luminous Intensity="150 mcd", Mounting Technology=SMT, Packaging="Tape and Reel", Part Number=150080RS75000, Peak Wavelength="630 nm", Published Date="November 2018", Publisher="Wurth Elektronik", Size=0805, Viewing Angle="140 deg"
D4 D5 D6 D7 D8 D9 D10 D11 D12 D13 D14 D15: library part 150080YS75000, "SMT Mono-color Chip LED Waterclear WL-SMCW, size 0805, Yellow, 2 V, 140 deg, 120 mcd", Forward Voltage="2 V", Operating Temperature="-40 to 85 degC", Chip Technology=AlInGaP, ComponentLink1Description=Manufacturer, ComponentLink1URL=http://www.we-online.de, ComponentLink2Description=Datasheet, ComponentLink2URL=https://katalog.we-online.de/led/datasheet/150080YS75000.pdf, Dominant Wavelength="590 nm", Emitting Color=Yellow, Luminous Intensity="120 mcd", Mounting Technology=SMT, Packaging="Tape and Reel", Part Number=150080YS75000, Peak Wavelength="595 nm", Publisher="Wurth Elektronik", Size=0805, Viewing Angle="140 deg"
D16: library part 824501500, "WE-TVSP Power TVS Diode, size DO-214AC, Bidirectional, 400 W, 5 VDC", Manufacturer="Wurth Elektronik", Operating Temperature="-65ºC to 150 ºC", Peak Pulse Current="43.5 A", Power Dissipation="400 W", Reverse Breakdown Voltage="6.7 V", Reverse Stand-Off Voltage="5 V", Surge Clamping Voltage="9.2 V", ComponentLink1Description=Manufacturer, ComponentLink1URL=http://www.we-online.de, ComponentLink2Description=Datasheet, ComponentLink2URL=https://katalog.we-online.de/pbs/datasheet/824501500.pdf, Mounting Technology=SMT, Packaging="Tape and Reel", Part Number=824501500, Polarity=Bidirectional, Size=DO-214AC
D17: library part 150080GS75000, "SMT Mono-color Chip LED Waterclear WL-SMCW, size 0805, Green, 3.2 V, 140 deg, 450 mcd", Forward Voltage="3.2 V", Operating Temperature="-40 to 85 degC", Chip Technology=InGaN, ComponentLink1Description=Manufacturer, ComponentLink1URL=http://www.we-online.de, ComponentLink2Description=Datasheet, ComponentLink2URL=https://katalog.we-online.de/led/datasheet/150080GS75000.pdf, Dominant Wavelength="525 nm", Emitting Color=Green, Luminous Intensity="450 mcd", Mounting Technology=SMT, Packaging="Tape and Reel", Part Number=150080GS75000, Peak Wavelength="515 nm", Published Date="November 2018", Publisher="Wurth Elektronik", Size=0805, Viewing Angle="140 deg"
D18: library part 150080VS75000, "SMT Mono-color Chip LED Waterclear WL-SMCW, size 0805, Bright Green, 2 V, 140 deg, 40 mcd", Forward Voltage="2 V", Operating Temperature="-40 to 85 degC", Chip Technology=AlInGaP, ComponentLink1Description=Manufacturer, ComponentLink1URL=http://www.we-online.de, ComponentLink2Description=Datasheet, ComponentLink2URL=https://katalog.we-online.de/led/datasheet/150080VS75000.pdf, Dominant Wavelength="570 nm", Emitting Color="Bright Green", Luminous Intensity="40 mcd", Mounting Technology=SMT, Packaging="Tape and Reel", Part Number=150080VS75000, Peak Wavelength="572 nm", Published Date="November 2018", Publisher="Wurth Elektronik", Size=0805, Viewing Angle="140 deg"
F1: library part 0437.500A, "437A Series Fuse", Manufacturer=Littlefuse, ComponentLink1Description=Datasheet, ComponentLink1URL=https://www.littelfuse.com/~/media/electronics/datasheets/fuses/littelfuse_fuse_437a_datasheet.pdf.pdf
FB1 FB2 FB3 FB4 FB5 FB6 FB7 FB8 FB9 FB10 FB11 FB12 FB13 FB14 FB15 FB16 FB17 FB18 FB19 FB20 FB21: library part 782853561, "WE-CBA SMD EMI Suppression Ferrite Bead, 0805, High Current, 1.5 A, 560 Ohm", DC Resistance max.="0.1 Ohm", Operating Temperature="-55 to 125 degC", Rated Current="1.5 A", ComponentLink1Description=Manufacturer, ComponentLink1URL=http://www.we-online.de, ComponentLink2Description=Datasheet, ComponentLink2URL=http://katalog.we-online.de/pbs/datasheet/782853561.pdf, Impedance="560 Ohm", Part Number=782853561, Published Date="Oct. 2017", Publisher="Wurth Elektronik", Size=0805, Type="High Current"
J1: "SMT Vertical Pin Header WR-PHD, Pitch 2.54 mm, Single Row, 4 pins", Contact Resistance="20 mOhm", Operating Temperature="-40 to 125 degC", Rated Current="3 A", Withstanding Voltage="500 VAC", Working Voltage="250 VAC", ComponentLink1Description=Manufacturer, ComponentLink1URL=http://www.we-online.de, ComponentLink2Description=Datasheet, ComponentLink2URL=https://katalog.we-online.de/em/datasheet/6100xx18221.pdf, Gender=Male, Mounting Technology=SMT, Orientation=Vertical, Packaging=Tube, Part Number=61000418221, Pin Number=4, Pitch="2.54 mm", Published Date="August 2018", Publisher="Wurth Elektronik", Row Number=Single
J2: "SMT Vertical Pin Header WR-PHD, Pitch 2.54 mm, Single Row, 6 pins", Contact Resistance="20 mOhm", Operating Temperature="-40 to 125 degC", Rated Current="3 A", Withstanding Voltage="500 VAC", Working Voltage="250 VAC", ComponentLink1Description=Manufacturer, ComponentLink1URL=http://www.we-online.de, ComponentLink2Description=Datasheet, ComponentLink2URL=https://katalog.we-online.de/em/datasheet/6100xx18221.pdf, Gender=Male, Mounting Technology=SMT, Orientation=Vertical, Packaging=Tube, Part Number=61000618221, Pin Number=6, Pitch="2.54 mm", Published Date="August 2018", Publisher="Wurth Elektronik", Row Number=Single
J3: "Micro-Fit 3.0 Vertical Header, 3.00mm Pitch, Dual Row, 4 Circuits, Black", Manufacturer=Molex, Operating Temperature="-40° to +105°C", Rated Current=8.5A, Rated Voltage="600V DC", Circuits=4, ComponentLink1Description=Datasheet, ComponentLink1URL=https://www.molex.com/webdocs/datasheets/pdf/en-us/0430450427_PCB_HEADERS.pdf, Number of Rows=2
J4: "THT Vertical Pin Header WR-PHD, Pitch 2.54 mm, Single Row, 13 pins", Contact Resistance="20 mOhm", Operating Temperature="-40 to 105 degC", Rated Current="3 A", Withstanding Voltage="500 VAC", Working Voltage="250 VAC", ComponentLink1Description=Manufacturer, ComponentLink1URL=http://www.we-online.de, ComponentLink2Description=Datasheet, ComponentLink2URL=https://katalog.we-online.de/em/datasheet/6130xx11121.pdf, Gender=Male, Mounting Technology=THT, Orientation=Vertical, Packaging=Bag, Part Number=61301311121, Pin Number=13, Pitch="2.54 mm", Published Date="August 2018", Publisher="Wurth Elektronik", Row Number=Single
J5: "THT Vertical Pin Header WR-PHD, Pitch 2.54 mm, Dual Row, 10 pins", Contact Resistance="20 mOhm", Operating Temperature="-40 to 105 degC", Rated Current="3 A", Withstanding Voltage="500 VAC", Working Voltage="250 VAC", ComponentLink1Description=Manufacturer, ComponentLink1URL=http://www.we-online.de, ComponentLink2Description=Datasheet, ComponentLink2URL=https://katalog.we-online.de/em/datasheet/6130xx21121.pdf, Gender=Male, Mounting Technology=THT, Orientation=Vertical, Packaging=Bag, Part Number=61301021121, Pin Number=10, Pitch="2.54 mm", Publisher="Wurth Elektronik", Row Number=Dual
J6: "THT Vertical Pin Header WR-PHD, Pitch 2.54 mm, Single Row, 8 pins", Contact Resistance="20 mOhm", Operating Temperature="-40 to 105 degC", Rated Current="3 A", Withstanding Voltage="500 VAC", Working Voltage="250 VAC", ComponentLink1Description=Manufacturer, ComponentLink1URL=http://www.we-online.de, ComponentLink2Description=Datasheet, ComponentLink2URL=https://katalog.we-online.de/em/datasheet/6130xx11121.pdf, Gender=Male, Mounting Technology=THT, Orientation=Vertical, Packaging=Bag, Part Number=61300811121, Pin Number=8, Pitch="2.54 mm", Published Date="August 2018", Publisher="Wurth Elektronik", Row Number=Single
Q1 Q2 Q3 Q4 Q5 Q6 Q7 Q8 Q9 Q10 Q11 Q12: "P-Channel OptiMOS P3 Small-Signal-Transistor, -30 V VDS, -2 A ID, -55 to 150 degC, PG-SOT23, Reel, Green", Manufacturer=Infineon, ComponentLink1Description="Manufacturer URL", ComponentLink1URL=http://www.infineon.com/, ComponentLink2Description=Datasheet, ComponentLink2URL=http://www.infineon.com/dgdl/BSS308PE_Rev23_.pdf?folderId=db3a304314dca38901154a72e3951a65&fileId=db3a304330f686060131099c80400073, ComponentLink3Description="Package Specification", ComponentLink3URL=http://www.infineon.com/dgdl/SOT23-Package_Overview.pdf?folderId=db3a30431936bc4b0119532290053c66&fileId=db3a30431936bc4b0119533468123c85, Green=TRUE, Halogen-free=TRUE, ID (max)="-2 A", IDpuls (max)="-8 A", Mounting Technology="Surface Mount", PackageDescription="3-Pin Small Outline Transistor Package, 2.9 x 1.3 mm Body, 0.95 mm Pitch", PackageReference=PG-SOT23, PartNumber=BSS308PE, Pto t (max)="0.5 W", QG="-5 nC", RDS (on) (max)="80 mOhm", RDS (on) (max) (@4.5V)="130 mOhm", Rth="250 K/W", VDS (max)="-30 V", VGS(th) (max)="-1 V", VGS(th) (min)="-2 V"
R1 R63 R64 R65 R66 R67 R68 R69 R70: library part CR0805-JW-103ELF, "Chip Resistor 0805", Manufacturer=Bourns, ComponentLink1Description=Datasheet, ComponentLink1URL=https://www.bourns.com/docs/product-datasheets/chpreztr.pdf?sfvrsn=566c91f1_11
R2 R44 R45 R46 R47 R48 R49 R50 R51 R52 R53 R54 R55 R56: library part CR0805-FX-1000ELF, "Chip Resistor 0805", Manufacturer=Bourns, ComponentLink1Description=Datasheet, ComponentLink1URL=https://www.bourns.com/docs/product-datasheets/chpreztr.pdf?sfvrsn=566c91f1_11
R3 R4 R6 R8 R9 R10 R11 R12 R13 R14 R15 R16 R17 R18 R19 R61 R62: library part CR0805-FX-4700GLF, "Chip Resistor 0805", Manufacturer=Bourns, ComponentLink1Description=Datasheet, ComponentLink1URL=https://www.bourns.com/docs/product-datasheets/chpreztr.pdf?sfvrsn=566c91f1_11
R5 R7: library part ERA6AEB60R4V, "Chip Resistor 0805", Manufacturer=Panasonic, ComponentLink1Description=Datasheet, ComponentLink1URL=https://www.bourns.com/docs/product-datasheets/chpreztr.pdf?sfvrsn=566c91f1_11
R20 R21 R22 R23 R24 R25 R26 R27 R28 R29 R30 R31: library part SMW215RJT, "SMD Moulded Power Resistor, Type SM Series", Manufacturer="TE Connectivity", Power Rating=2W, ComponentLink1Description=Datasheet, ComponentLink1URL=https://www.te.com/commerce/DocumentDelivery/DDEController?Action=showdoc&DocId=Data+Sheet%7F1773242%7FE%7Fpdf%7FEnglish%7FENG_DS_1773242_E.pdf%7F5-1676966-3
R32 R33 R34 R35 R36 R37 R38 R39 R40 R41 R42 R43: library part CR0805-JW-102ELF, "Chip Resistor 0805", Manufacturer=Bourns, ComponentLink1Description=Datasheet, ComponentLink1URL=https://www.bourns.com/docs/product-datasheets/chpreztr.pdf?sfvrsn=566c91f1_11
R57 R58 R59 R60 R71 R72: library part CR0805-FX-4701GLF, "Chip Resistor 0805", Manufacturer=Bourns, ComponentLink1Description=Datasheet, ComponentLink1URL=https://www.bourns.com/docs/product-datasheets/chpreztr.pdf?sfvrsn=566c91f1_11
RT1 RT2: library part NXRT15XV103FA1B040, "NTC Thermistor Leaded type NXRT Series", Manufacturer=Murata, ComponentLink1Description=Datasheet, ComponentLink1URL=https://www.murata.com/en-global/products/productdata/8796838297630/S0423E.pdf?1482204603000, ComponentLink2Description=Catalog, ComponentLink2URL=https://www.murata.com/~/media/webrenewal/support/library/catalog/products/thermistor/ntc/r44e.ashx?la=en, Reference=NXRT15XV103FA1B040
U1: "16-bit Microcontroller / (up to 128 KB Flash and 8K SRAM) with Advanced Analog", Manufacturer=Microchip, ComponentLink1Description=Datasheet, ComponentLink1URL=http://ww1.microchip.com/downloads/en/devicedoc/70293g.pdf, Pins=28
U2: "Galvanically isolated CAN / transceiver", Manufacturer="Texas Instruments", ComponentLink1Description=Datasheet, ComponentLink1URL=http://www.ti.com/lit/ds/symlink/iso1050.pdf, Pins=16
U3: "Multicell Battery Monitors", Manufacturer="Analog Devices", ComponentLink1Description=Datasheet, ComponentLink1URL=https://www.analog.com/media/en/technical-documentation/data-sheets/68111fb.pdf, Datasheet=https://www.analog.com/media/en/technical-documentation/data-sheets/68111fb.pdf, Pins=48
U4: library part R-78HB5.0-0.5, "High efficiency, high input voltage switching regulator.", ComponentLink1Description="Datasheet R-78HB5.0-0.5", ComponentLink1URL=https://www.recom-power.com/pdf/Innoline/R-78HBxx-0.5_L.pdf, ComponentLink2Description="Datasheet 173010542", ComponentLink2URL=https://katalog.we-online.de/pm/datasheet/173010542.pdf
U5: library part LM1117IMP-3.3/NOPB, "800-mA Low-Dropout Linear Regulator", Input Voltage="1.5-13.8 V", Manufacturer="Texas Instruments", Output Current="800 mA", Output Voltage="3.3 V", ComponentLink1Description=Datasheet, ComponentLink1URL=http://www.ti.com/lit/ds/symlink/lm1117.pdf, Reference=LM1117-3.3
U6: "ADC. Single Chip 12-Bit Data Acquisition System.", Manufacturer=Linear, SupplyCurrent="6 mA", SupplyVoltage="+/- 5V", ComponentLink1Description=Datasheet, ComponentLink1URL=https://www.analog.com/media/en/technical-documentation/data-sheets/129346fs.pdf, NumberOfChannels=8, Pins=20, Resolution="12 bits"
XTAL1: library part 830028710, "Industry standard SMD crystal WE-XTAL Quartz Crystal", Manufacturer="Wurth Elektronik", ComponentLink1Description=Datasheet, ComponentLink1URL=https://katalog.we-online.com/pbs/datasheet/830028710.pdf, Frequency=20MHz, Model=HC49/4HSMX, Mounting Technology=SMT

## Via types
v1: diameter 1.15, hole 1.15, Top Layer to Bottom Layer, 2 vias

## Nets (pads, with @x,y where several pads share a name; then routed paths per layer and width w, separated by ;. In a path a pad name is that pad's centre, name@x,y a point inside that pad or via, vN(x,y) a via of type N, cw(c..) or ccw(c..) an arc to the next point about the centre after c; other vN are vias at no path point)
+3.3: C4.1 C5.1 C6.2 C7.2 C8.2 C9.2 C47.2 J1.1 J2.2 R1.2 R62.2 R63.2 R64.2 R65.2 R66.2 R67.2 R68.2 R69.2 R70.2 U1.13 U1.28 U2.1 U5.3
+5: C42.2 C46.2 C56.2 C57.2 D16.2 F1.2 R57.2 R58.2 R59.2 R60.2 R61.2 R71.2 R72.2 U3.37 U3.39 U5.1 U6.14 U6.20
GND: C1.1 C2.2 C3.2 C4.2 C5.2 C6.1 C8.1 C9.1 C10.1 C13.1 C14.1 C15.1 C16.1 C17.1 C18.1 C19.1 C20.1 C21.1 C22.1 C23.1 C24.1 C25.1 C38.2 C39.2 C40.1 C41.1 C42.1 C43.1 C44.1 C45.1 C46.1 C47.1 C48.1 C49.1 C50.1 C51.1 C52.1 C53.1 C54.1 C55.1 C56.1 C57.1 D1.1 D2.1 D3.1 D16.1 D17.1 D18.1 FB15.2 J1.2 J2.3 J6.4 RT1.1 RT2.1 U1.3 U1.7 U1.8 U1.17 U1.18 U1.19 U1.27 U3.30 U3.31 U3.40 U3.45 U3.46 U3.47 U3.48 U4.2 U5.2 U6.9 U6.10 U6.11 U6.12 U6.13
NetC1_2: C1.2 J2.1 R1.1 R2.1
NetC2_1: C2.1 U1.9 XTAL1.2
NetC3_1: C3.1 U1.10 XTAL1.1
NetC7_1: C7.1 U2.2 U2.7 U2.8
NetC10_2: C10.2 U1.20
NetC11_1: C11.1 C12.1 J3.4 U2.9 U2.10 U2.15
NetC11_2: C11.2 J3.1 U2.16
NetC12_2: C12.2 R5.1 R7.1
NetC13_2: C13.2 C27.2 R44.2 U3.2
NetC14_2: C14.2 C27.1 C28.2 R45.2 U3.4
NetC15_2: C15.2 C28.1 C29.2 R46.2 U3.6
NetC16_2: C16.2 C29.1 C30.2 R47.2 U3.8
NetC17_2: C17.2 C30.1 C31.2 R48.2 U3.10
NetC18_2: C18.2 C26.2 C31.1 R49.2 U3.12
NetC19_2: C19.2 C26.1 C32.2 R50.2 U3.14
NetC20_2: C20.2 C32.1 C33.2 R51.2 U3.16
NetC21_2: C21.2 C33.1 C34.2 R52.2 U3.18
NetC22_2: C22.2 C34.1 C35.2 R53.2 U3.20
NetC23_2: C23.2 C35.1 C36.2 R54.2 U3.22
NetC24_2: C24.2 C36.1 C37.2 R55.2 U3.24
NetC25_2: C25.2 C37.1 R56.2 U3.26
NetC38_1: C38.1 C39.1 C43.2 C44.2 C45.2 FB1.2 U3.1 U4.1
NetC40_2: C40.2 U3.34
NetC41_2: C41.2 U3.35
NetC48_2: C48.2 R63.1 RT1.2 U6.1
NetC49_2: C49.2 R64.1 RT2.2 U6.2
NetC50_2: C50.2 FB16.2 R65.1 U6.3
NetC51_2: C51.2 FB17.2 R66.1 U6.4
NetC52_2: C52.2 FB18.2 R67.1 U6.5
NetC53_2: C53.2 FB19.2 R68.1 U6.6
NetC54_2: C54.2 FB20.2 R69.1 U6.7
NetC55_2: C55.2 FB21.2 R70.1 U6.8
NetD1_2: D1.2 R3.1
NetD2_2: D2.2 R4.1
NetD3_2: D3.2 R6.1
NetD4_1: D4.1 R8.2
NetD4_2: D4.2 Q1.3 R20.2
NetD5_1: D5.1 R9.2
NetD5_2: D5.2 Q2.3 R21.2
NetD6_1: D6.1 R10.2
NetD6_2: D6.2 Q3.3 R22.2
NetD7_1: D7.1 R11.2
NetD7_2: D7.2 Q4.3 R23.2
NetD8_1: D8.1 R12.2
NetD8_2: D8.2 Q5.3 R24.2
NetD9_1: D9.1 R13.2
NetD9_2: D9.2 Q6.3 R25.2
NetD10_1: D10.1 R14.2
NetD10_2: D10.2 Q7.3 R26.2
NetD11_1: D11.1 R15.2
NetD11_2: D11.2 Q8.3 R27.2
NetD12_1: D12.1 R16.2
NetD12_2: D12.2 Q9.3 R28.2
NetD13_1: D13.1 R17.2
NetD13_2: D13.2 Q10.3 R29.2
NetD14_1: D14.1 R18.2
NetD14_2: D14.2 Q11.3 R30.2
NetD15_1: D15.1 R19.2
NetD15_2: D15.2 Q12.3 R31.2
NetD17_2: D17.2 R61.1
NetD18_2: D18.2 R62.1
NetF1_1: F1.1 U4.3
NetFB1_1: FB1.1 FB2.1 J4.1 J5.1 J5.2
NetFB2_2: FB2.2 Q1.2 R44.1
NetFB3_1: FB3.1 J4.2 J5.3 J5.4
NetFB3_2: FB3.2 Q2.2 R8.1 R20.1 R45.1
NetFB4_1: FB4.1 J4.3 J5.5 J5.6
NetFB4_2: FB4.2 Q3.2 R9.1 R21.1 R46.1
NetFB5_1: FB5.1 J4.4 J5.7 J5.8
NetFB5_2: FB5.2 Q4.2 R10.1 R22.1 R47.1
NetFB6_1: FB6.1 J4.5 J5.9 J5.10
NetFB6_2: FB6.2 Q5.2 R11.1 R23.1 R48.1
NetFB7_1: FB7.1 J4.6
NetFB7_2: FB7.2 Q6.2 R12.1 R24.1 R49.1
NetFB8_1: FB8.1 J4.7
NetFB8_2: FB8.2 Q7.2 R13.1 R25.1 R50.1
NetFB9_1: FB9.1 J4.8
NetFB9_2: FB9.2 Q8.2 R14.1 R26.1 R51.1
NetFB10_1: FB10.1 J4.9
NetFB10_2: FB10.2 Q9.2 R15.1 R27.1 R52.1
NetFB11_1: FB11.1 J4.10
NetFB11_2: FB11.2 Q10.2 R16.1 R28.1 R53.1
NetFB12_1: FB12.1 J4.11
NetFB12_2: FB12.2 Q11.2 R17.1 R29.1 R54.1
NetFB13_1: FB13.1 J4.12
NetFB13_2: FB13.2 Q12.2 R18.1 R30.1 R55.1
NetFB14_1: FB14.1 FB15.1 J4.13
NetFB14_2: FB14.2 R19.1 R31.1 R56.1
NetFB16_1: FB16.1 J6.1
NetFB17_1: FB17.1 J6.2
NetFB18_1: FB18.1 J6.3
NetFB19_1: FB19.1 J6.5
NetFB20_1: FB20.1 J6.6
NetFB21_1: FB21.1 J6.7
NetJ1_3: J1.3 U1.21
NetJ1_4: J1.4 U1.22
NetJ2_4: J2.4 U1.4
NetJ2_5: J2.5 U1.5
NetJ3_2: J3.2 R5.2 U2.13
NetJ3_3: J3.3 R7.2 U2.12
NetQ1_1: Q1.1 R32.1
NetQ2_1: Q2.1 R33.1
NetQ3_1: Q3.1 R34.1
NetQ4_1: Q4.1 R35.1
NetQ5_1: Q5.1 R36.1
NetQ6_1: Q6.1 R37.1
NetQ7_1: Q7.1 R38.1
NetQ8_1: Q8.1 R39.1
NetQ9_1: Q9.1 R40.1
NetQ10_1: Q10.1 R41.1
NetQ11_1: Q11.1 R42.1
NetQ12_1: Q12.1 R43.1
NetR2_2: R2.2 U1.1
NetR3_2: R3.2 U1.23
NetR4_2: R4.2 U1.24
NetR6_2: R6.2 U1.6
NetR32_2: R32.2 U3.3
NetR33_2: R33.2 U3.5
NetR34_2: R34.2 U3.7
NetR35_2: R35.2 U3.9
NetR36_2: R36.2 U3.11
NetR37_2: R37.2 U3.13
NetR38_2: R38.2 U3.15
NetR39_2: R39.2 U3.17
NetR40_2: R40.2 U3.19
NetR41_2: R41.2 U3.21
NetR42_2: R42.2 U3.23
NetR43_2: R43.2 U3.25
NetR57_1: R57.1 U1.2 U3.41
NetR58_1: R58.1 U1.14 U3.42 U6.18
NetR59_1: R59.1 U1.15 U3.43 U6.15
NetR60_1: R60.1 U1.16 U3.44 U6.16
NetR71_1: R71.1 U1.11 U6.19
NetR72_1: R72.1 U1.12 U6.17
NetU1_25: U1.25 U2.6
NetU1_26: U1.26 U2.3
pads on no net: J2.6 J6.8 U2.4 U2.5 U2.11 U2.14 U3.27 U3.28 U3.29 U3.32 U3.33 U3.36 U3.38 U5.4
copper on no net:
  other v1: 65.035,118.796 74.035,118.796

## Silkscreen, mask and mechanical layers (free items; w line width, h text height)
Top Overlay:
  lines w0.254: 12.192,5.588 96.647,5.588 96.647,63.627 12.192,63.627 12.192,5.588

## Text inside footprints (layer, text, board x,y; h text height)
D1: Top Overlay "+" at 113.65,121.041 h1.5 r180
D2: Top Overlay "+" at 117.46,121.041 h1.5 r180
D3: Top Overlay "+" at 121.778,121.041 h1.5 r180
D4: Top Overlay "+" at 30.018,15.124 h1.5 r180
D5: Top Overlay "+" at 32.927,15.124 h1.5 r180
D6: Top Overlay "+" at 35.837,15.124 h1.5 r180
D7: Top Overlay "+" at 38.746,15.124 h1.5 r180
D8: Top Overlay "+" at 41.656,15.124 h1.5 r180
D9: Top Overlay "+" at 44.565,15.124 h1.5 r180
D10: Top Overlay "+" at 47.475,15.124 h1.5 r180
D11: Top Overlay "+" at 50.384,15.124 h1.5 r180
D12: Top Overlay "+" at 53.294,15.124 h1.5 r180
D13: Top Overlay "+" at 56.203,15.124 h1.5 r180
D14: Top Overlay "+" at 59.113,15.124 h1.5 r180
D15: Top Overlay "+" at 62.022,15.124 h1.5 r180
D17: Top Overlay "+" at 86.336,9.098 h1.5 r90
D18: Top Overlay "+" at 86.37,12.4 h1.5 r90
J1: Top Overlay "1" at 92.274,110.597 h1.5 r90; Top Overlay "4" at 87.674,120.397 h1.5 r90
J2: Top Overlay "6" at 39.795,120.397 h1.5 r90; Top Overlay "1" at 44.395,105.517 h1.5 r90
J4: Top Overlay "13" at 45.598,9.854 h1.5; Top Overlay "1" at 15.628,9.854 h1.5
J5: Top Overlay "2" at 13.318,14.489 h1.5; Top Overlay "1" at 13.618,11.789 h1.5; Top Overlay "9" at 27.638,11.789 h1.5; Top Overlay "10" at 27.638,14.489 h1.5
J6: Top Overlay "1" at 112.346,44.36 h1.5 r90; Top Overlay "8" at 112.346,61.88 h1.5 r90